# Altium PCB USB_SPI_FLASH.PcbDoc
Units mil, origin at the board's own origin, x right, y up, seen from the top; angles counter-clockwise.
Board outline 1900 x 1950 mil, 2 copper layers (Top Layer, Bottom Layer); 28 components, 20 nets, 122 pads, 16 vias.
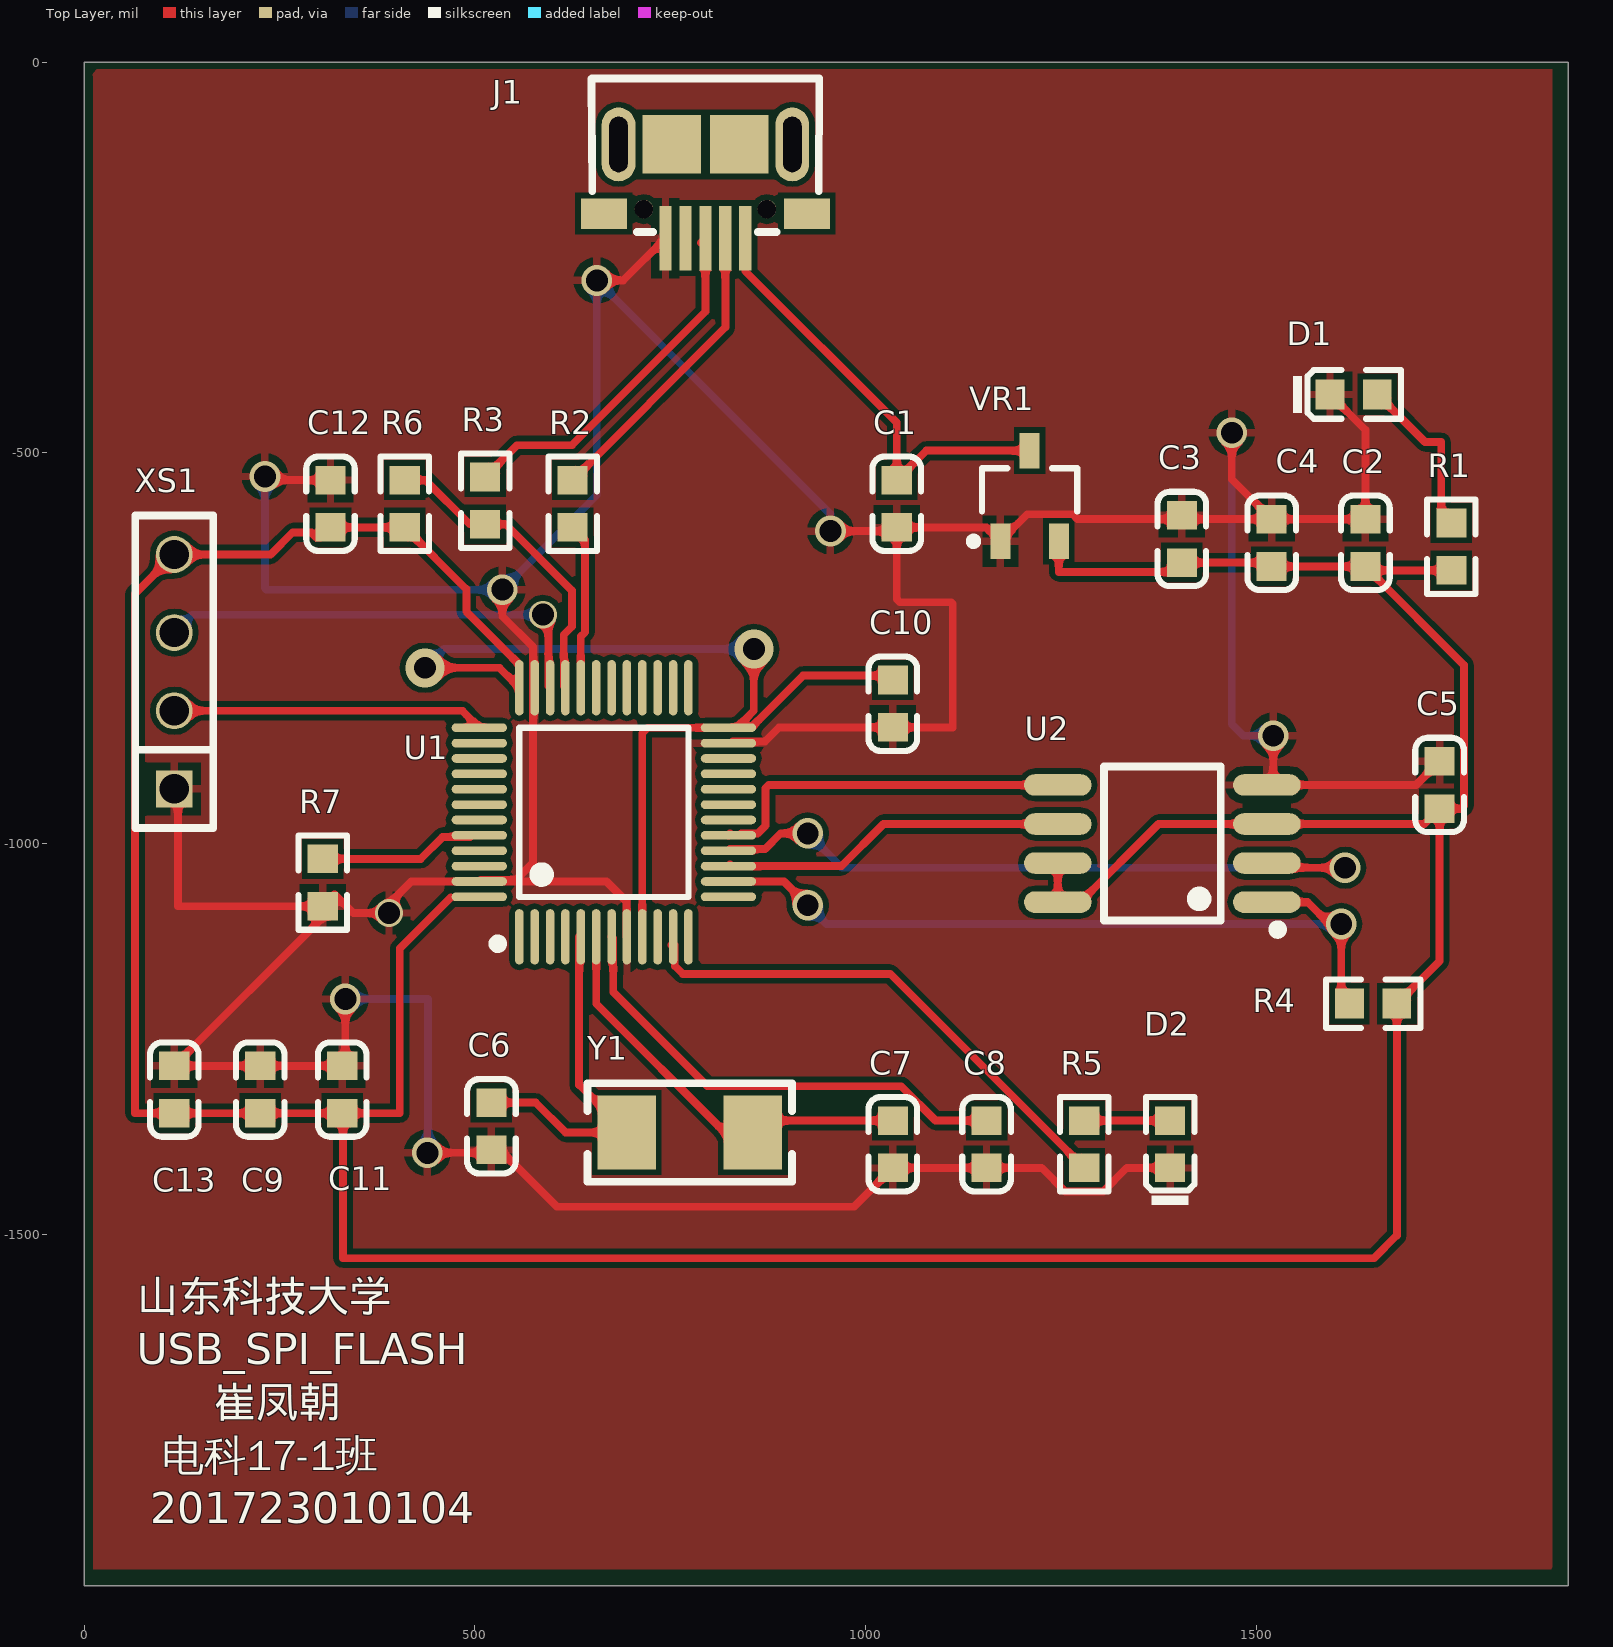
[diagram p0: Top Layer view]
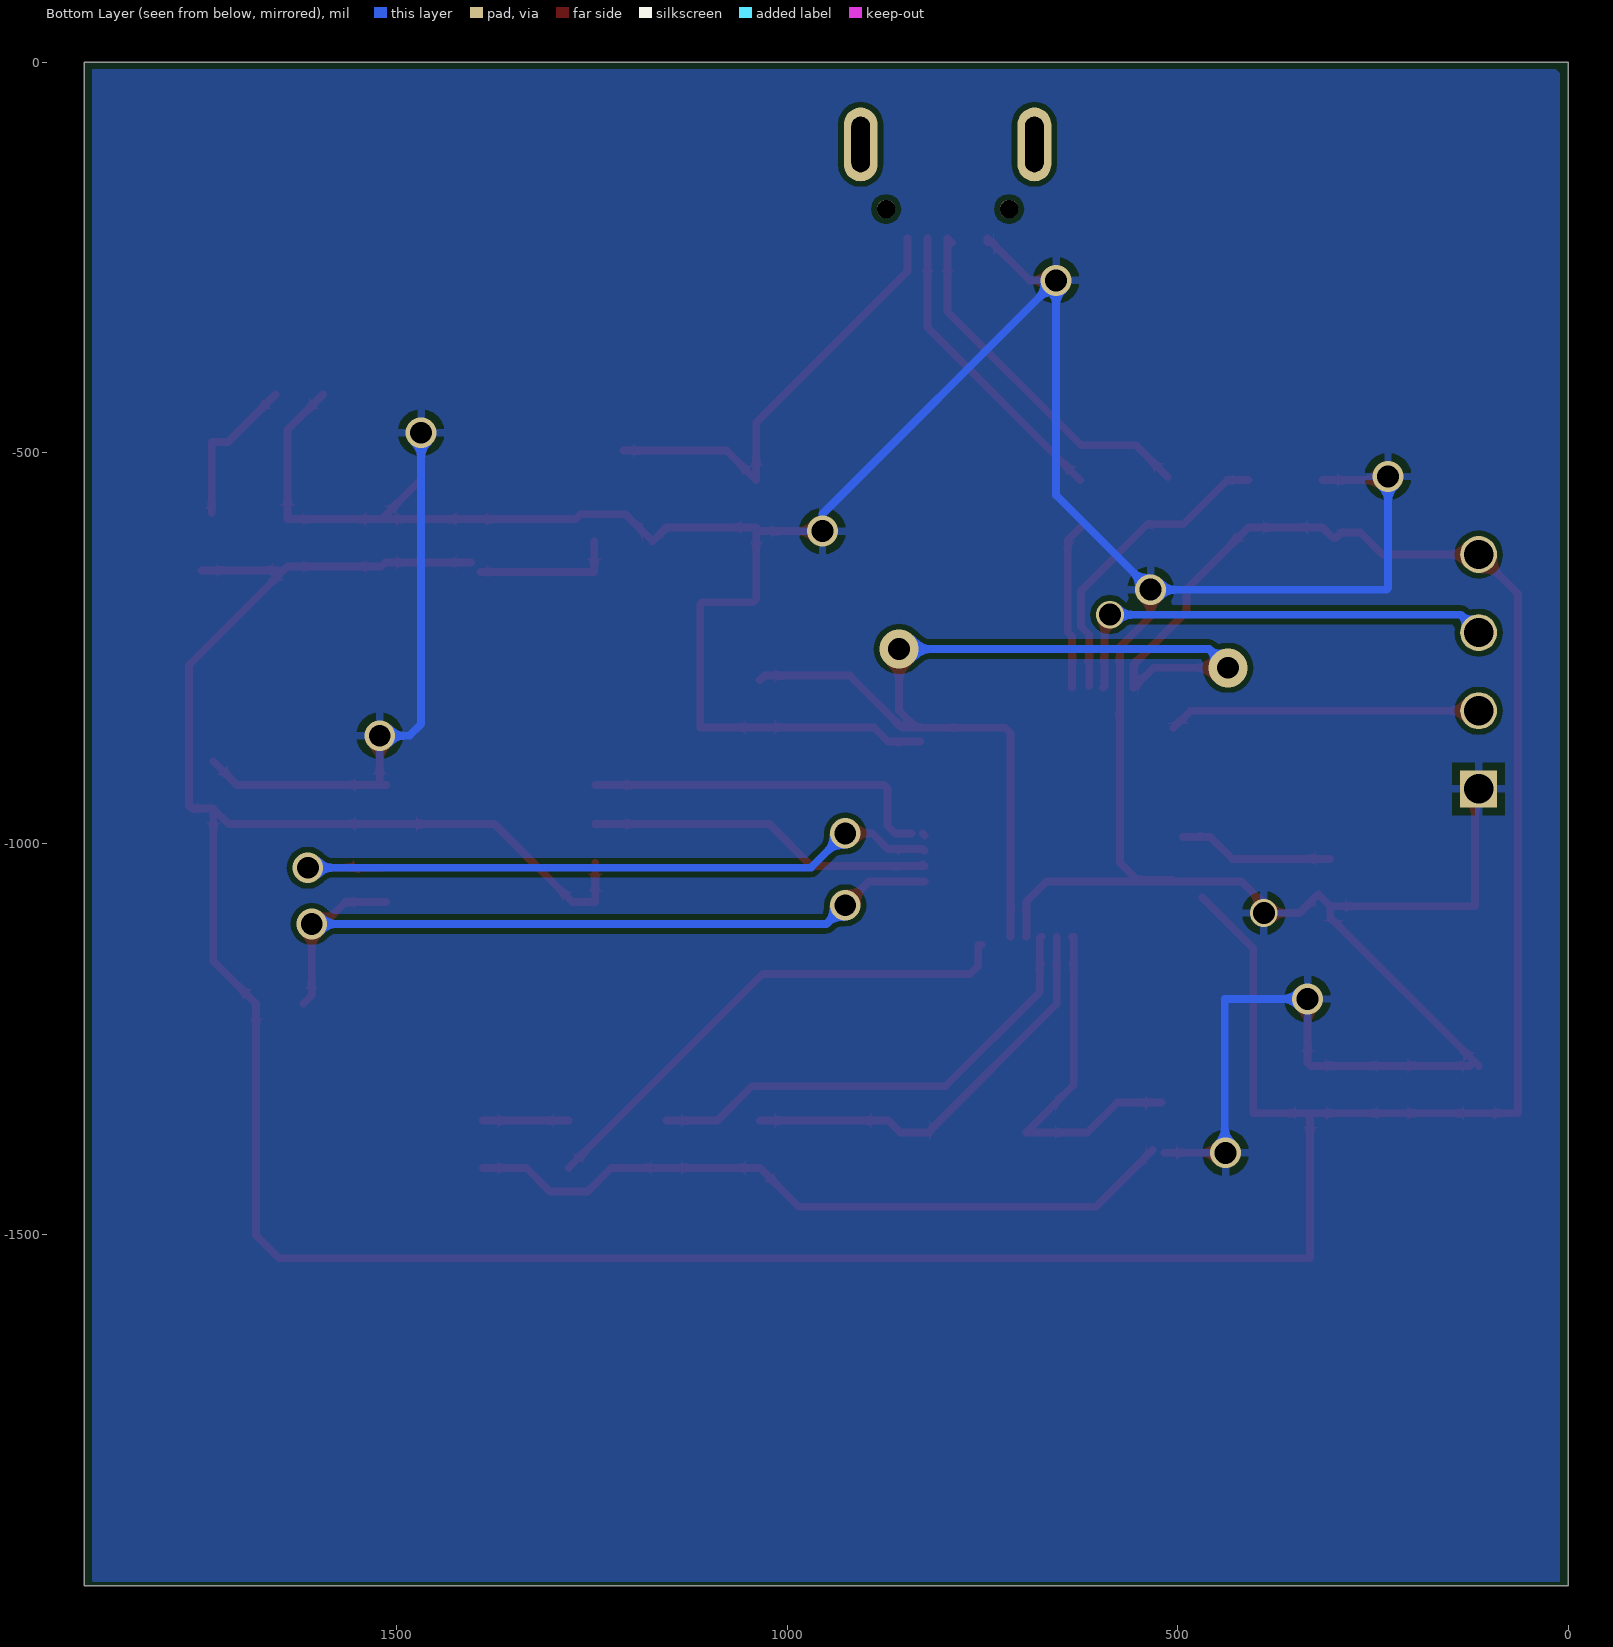
[diagram p1: Bottom Layer view, seen from below]
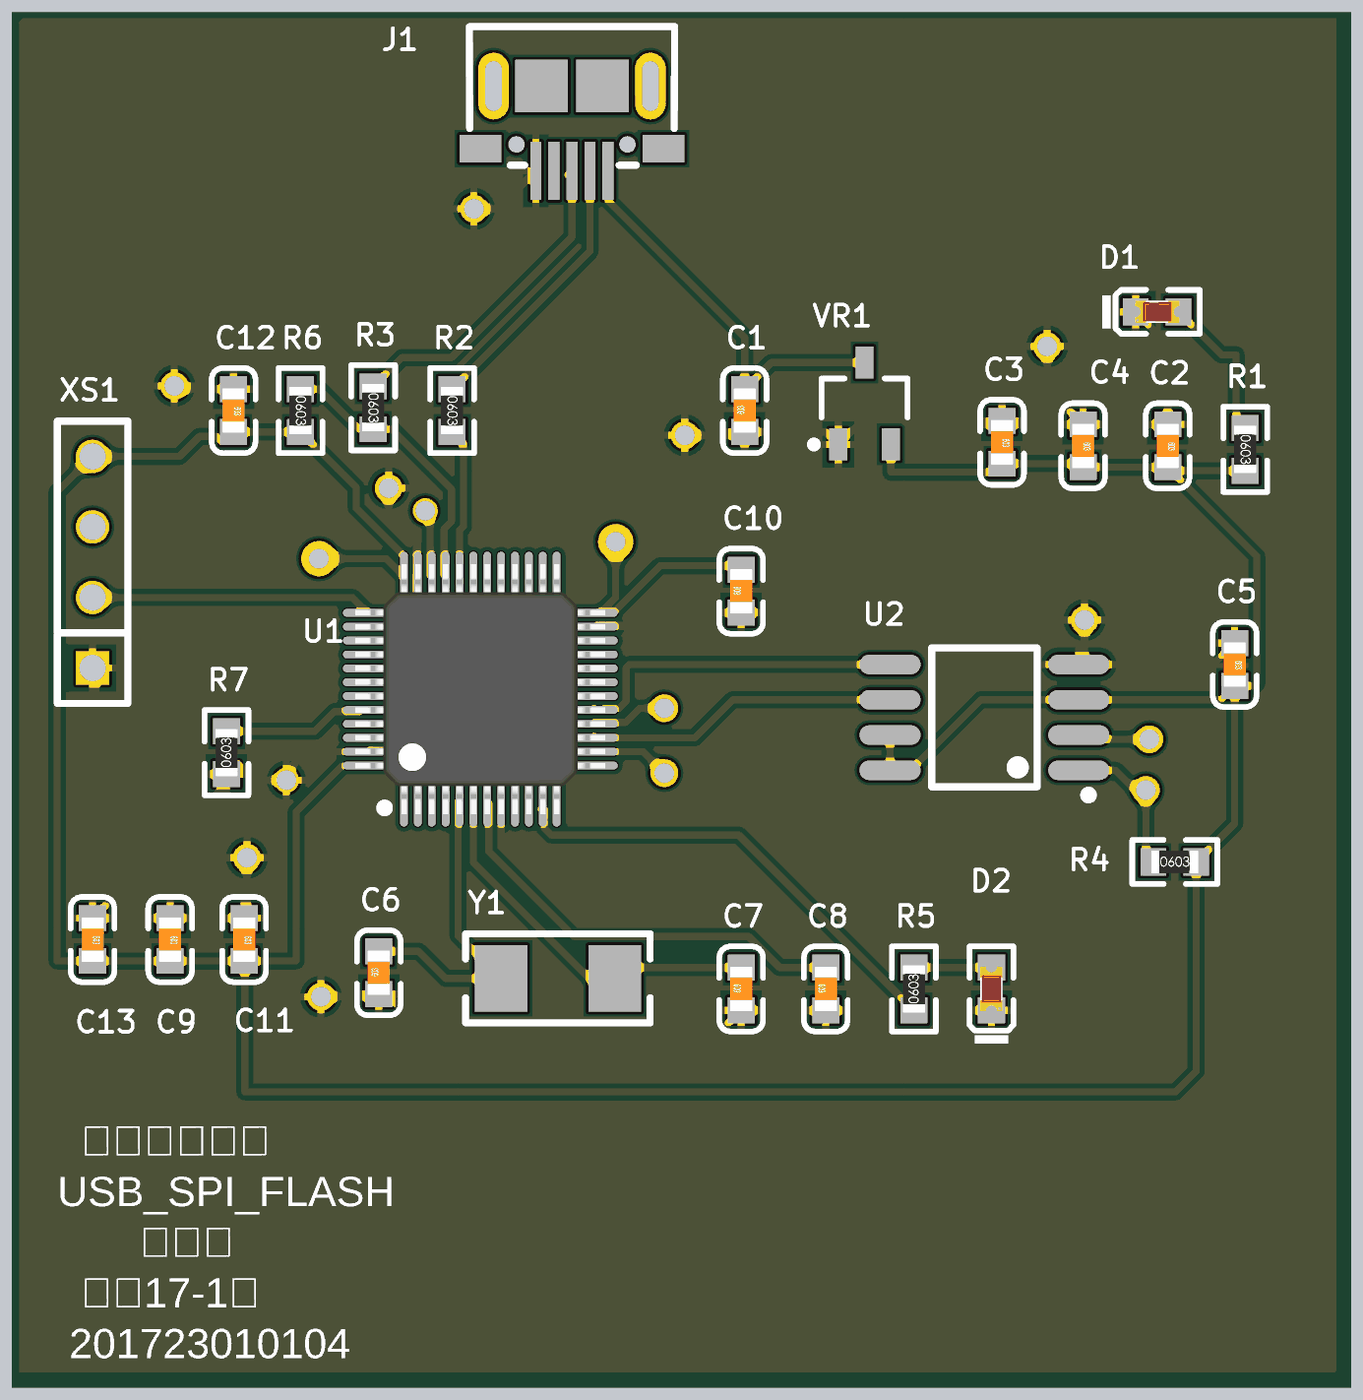
[diagram p2: 3D render of the assembled board from above, using the file's embedded part models]

## Layer stack, top to bottom
Top Solder: solder mask 0.4, Solder Resist, Dk 3.5
Top Layer: signal copper 1.4
Dielectric 1: dielectric 12.6, FR-4, Dk 4.8
Bottom Layer: signal copper 1.4
Bottom Solder: solder mask 0.4, Solder Resist, Dk 3.5

## Board outline
0,-1950 0,0 1900,0 1900,-1950

## Design rules (kind name [scope] priority, off if disabled: settings)
Clearance [All] p1: gap=7
PolygonConnect [All] p1: connectstyle=Relief reliefconductorwidth=10 reliefentries=4 polygonreliefangle="90 Angle" airgapwidth=10
RoutingVias [All] p1: holewidth=28 width=50 viastyle="Through Hole" minholewidth=28 minwidth=35.43 maxholewidth=28 maxwidth=50
SolderMaskExpansion [All] p1: expansion=4
Width [All] p1: maxlimit=15 minlimit=10 preferedwidth=12
30 further rules are at their usual default settings.

## Components (designator, comment, footprint, x,y, rotation, side; value= is the part's Value field where it differs from the comment)
C1 "10uF (106) 10% 10V" 0603_C 1040,-565 r90 top
C2 "100nF (104) 10% 50V" 0603_C 1640,-615 r270 top
C3 "10uF (106) 10% 10V" 0603_C 1405,-610 r270 top
C4 "10uF (106) 10% 10V" 0603_C 1520,-615 r270 top
C5 "100nF (104) 10% 50V" 0603_C 1735,-925 r270 top
C6 "18pF (180) 5% 50V" 0603_C 521,-1362 r90 top
C7 "18pF (180) 5% 50V" 0603_C 1035,-1385 r90 top
C8 "100nF (104) 10% 50V" 0603_C 1155,-1385 r90 top
C9 "100nF (104) 10% 50V" 0603_C 225,-1315 r270 top
C10 "100nF (104) 10% 50V" 0603_C 1035,-821 r90 top
C11 "100nF (104) 10% 50V" 0603_C 330,-1315 r270 top
C12 "100nF (104) 10% 50V" 0603_C 315,-565 r270 top
C13 "4.7uF (475) 10% 16V" 0603_C 115,-1315 r270 top
D1 "红灯 0603" 0603_LED_S1 1625,-425 r0 top
D2 "绿灯 0603" 0603_LED_S1 1390,-1385 r90 top
J1 "USB插头" MICRO-USB-SMD_5P-P0.65-H-F_MICRO5.9MMUSB 795,-165 r180 top
R1 "2KΩ (2001) ±1%" 0603_R 1750,-620 r270 top
R2 "20Ω (20R0) ±1%" 0603_R 625,-565 r270 top
R3 "20Ω (20R0) ±1%" 0603_R 513,-561 r270 top
R4 "10KΩ (1002) ±1%" 0603_R 1650,-1205 r0 top
R5 "2KΩ (2001) ±1%" 0603_R 1280,-1385 r90 top
R6 "1.5KΩ (1501) ±1%" 0603_R 410,-565 r270 top
R7 "10KΩ (1002) ±1%" 0603_R 305,-1050 r90 top
U1 "STM32F103C8T6" LQFP-48_7x7x05P 665,-960 r0 top
U2 "W25Q128JVSIQTR" SOIC-8_208mil 1380,-1000 r90 top
VR1 "XC6206P332MR" SOT-23-3L 1210,-555 r270 top
XS1 "2.54单排单塑排针1*4P" PIN4 115,-930 r90 top
Y1 "8MHz ±20ppm 20pF" SMD-5032_2P 775,-1370 r0 top

## Footprints (in the part's own frame and the unit in brackets; to place one, negate y for a bottom-side part, rotate by r counter-clockwise, add the part's x,y. Pads: shape width x height; smd on the part's side, far side on the other; paste and mask are expansions set on the pad)
0603_C [mm]
  rect 0.93x0.98 smd: 1(-0.77,0) 2(0.77,0)
  silkscreen extent -1.53,-0.79 1.54,0.79, body extent -0.8,-0.4 0.8,0.4, height 0.3
0603_LED_S1 [mm]
  rect 0.93x0.98 smd: A(0.77,0) K(-0.77,0)
  silkscreen extent -1.97,-0.79 1.54,0.79, body extent -0.8,-0.4 0.8,0.4, height 0.6
0603_R [mm]
  rect 0.93x0.98 smd: 1(-0.77,0) 2(0.77,0)
  silkscreen extent -1.53,-0.79 1.54,0.79, body extent -0.85,-0.4 0.85,0.4, height 0.56
LQFP-48_7x7x05P [mm]
  oval 0.28x1.8 smd mask+0.051: 1(-2.75,-4.05) 2(-2.25,-4.05) 3(-1.75,-4.05) 4(-1.25,-4.05) 5(-0.75,-4.05) 6(-0.25,-4.05) 7(0.25,-4.05) 8(0.75,-4.05) 9(1.25,-4.05) 10(1.75,-4.05) 11(2.25,-4.05) 12(2.75,-4.05) 25(2.75,4.05) 26(2.25,4.05) 27(1.75,4.05) 28(1.25,4.05) 29(0.75,4.05) 30(0.25,4.05) 31(-0.25,4.05) 32(-0.75,4.05) 33(-1.25,4.05) 34(-1.75,4.05) 35(-2.25,4.05) 36(-2.75,4.05)
  oval 1.8x0.28 smd mask+0.051: 13(4.05,-2.75) 14(4.05,-2.25) 15(4.05,-1.75) 16(4.05,-1.25) 17(4.05,-0.75) 18(4.05,-0.25) 19(4.05,0.25) 20(4.05,0.75) 21(4.05,1.25) 22(4.05,1.75) 23(4.05,2.25) 24(4.05,2.75) 37(-4.05,2.75) 38(-4.05,2.25) 39(-4.05,1.75) 40(-4.05,1.25) 41(-4.05,0.75) 42(-4.05,0.25) 43(-4.05,-0.25) 44(-4.05,-0.75) 45(-4.05,-1.25) 46(-4.05,-1.75) 47(-4.05,-2.25) 48(-4.05,-2.75)
  silkscreen extent -3.6,-4.42 2.75,2.75, body extent -4.5,-4.5 4.5,4.5, height 1.6
MICRO-USB-SMD_5P-P0.65-H-F_MICRO5.9MMUSB [mm]
  rect 0.4x2.1 smd: 1(-1.3,1.525) 2(-0.65,1.525) 3(0,1.525) 4(0.65,1.525) 5(1.3,1.525)
  rect 1.5x1 smd: 6(-3.3,0.725) 6(3.3,0.725)
  oval 1.1x2.399 hole 0.6 slot 1.8 at 90 deg: 6(-2.825,-1.525) 6(2.825,-1.525)
  rect 1.9x1.9 smd: 6(-1.1,-1.525) 6(1.1,-1.525)
  round 0.6 hole 0.6 unplated: ""(-2,0.575) ""(2,0.575)
  silkscreen extent -3.7,-3.67 3.7,1.32
PIN4 [mm]
  rect 1.2x1.2 hole 0.95: 1(0,0)
  round 1.2 hole 0.95: 2(2.54,0) 3(5.08,0) 4(7.62,0)
  silkscreen extent -1.27,-1.27 8.89,1.27
SMD-5032_2P [mm]
  rect 1.9x2.4 smd: 1(-2.05,0) 2(2.05,0)
  silkscreen extent -3.32,-1.6 3.32,1.6
SOIC-8_208mil [mm]
  oval 0.7x2.2 smd: 1(-1.905,-3.4) 2(-0.635,-3.4) 3(0.635,-3.4) 4(1.905,-3.4) 5(1.905,3.4) 6(0.635,3.4) 7(-0.635,3.4) 8(-1.905,3.4)
  silkscreen extent -2.95,-3.9 2.5,1.9
SOT-23-3L [mm] "http://www.aosmd.com/res/packaging_information/SOT-23-3L.pdf"
  rect 1.15x0.65 smd: 1(1.475,-0.95) 2(1.475,0.95) 3(-1.475,0)
  silkscreen extent -0.9,-1.95 1.6,1.55, body extent -0.9,-1.55 0.9,1.55, height 1.25

## Part data
C1 C3 C4: library part "0603 10uF (106) 10% 10V", "贴片电容"
C2 C5 C8 C9 C10 C11 C12: library part "0603 100nF (104) 10% 50V", "贴片电容"
C6 C7: library part "0603 18pF (180) 5% 50V", "贴片电容"
C13: library part "0603 4.7uF (475) 10% 16V", "贴片电容"
D1: library part "0603 红灯", "发光二极管"
D2: library part "0603 绿灯", "发光二极管"
J1: library part USB-SMD-5.9MM
R1 R5: library part "0603 2KΩ (2001) 1%", "贴片电阻"
R2 R3: library part "0603 20Ω (20R0) 1%", "贴片电阻"
R4 R7: library part "0603 10KΩ (1002) 1%", "贴片电阻"
R6: library part "0603 1.5KΩ (1501) 1%", "贴片电阻"
U1: "ARM"
U2: library part W25Q128JVSIQTR_[C97521], "Flash ROM"
VR1: library part "SOT-23 XC6206P332MR", "低压差线性稳压(LDO)"
Y1: library part "SMD-5032_2P 8MHz 20ppm 20pF", "贴片晶振"

## Via types
v1: diameter 39.37, hole 28, Top Layer to Bottom Layer, 12 vias
v2: diameter 35.43, hole 28, Top Layer to Bottom Layer, 2 vias
v3: diameter 50, hole 28, Top Layer to Bottom Layer, 2 vias

## Nets (pads, with @x,y where several pads share a name; then routed paths per layer and width w, separated by ;. In a path a pad name is that pad's centre, name@x,y a point inside that pad or via, vN(x,y) a via of type N, cw(c..) or ccw(c..) an arc to the next point about the centre after c; other vN are vias at no path point)
3V3: C2.2 C3.2 C4.2 C5.2 C9.2 C10.2 C11.2 C12.2 C13.2 R1.2 R4.2 R6.2 U1.9 U1.24 U1.36 U1.48 U2.3 U2.7 U2.8 VR1.2 XS1.4 | length 6862.4
  Top Layer w10: v3(436,-775) 531.18,-775 U1.36 556.73,-770.73 489,-703 489,-674.32 R6.2 C12.2 301.69,-608.62 297.78,-608.62 290.75,-601.59 266.71,-601.59 238.3,-630 XS1.4 64.68,-680.32 64.68,-1345.32 C13.2 C9.2 C11.2 ; 469,-1069 403.68,-1134.32 403.68,-1345.32 C11.2 ; U1.9 714.21,-858.79 721.27,-851.73 U1.24 U1.24@835.27,-851.73 ; v3(857,-751) 857,-830 U1.24@835.27,-851.73 ; C10.2 1029.31,-785 920,-785 853.27,-851.73 U1.24@835.27,-851.73 ; U2.7 U2.8 1275,-1075 1375,-975 U2.3 1715.32,-975 C5.2 ; VR1.2 1247.4,-652.4 C3.2@1392.91,-652.4 ; C3.2 C4.2@1515,-640.32 ; C4.2 C2.2 C2.2@1645,-650.32 ; R1.2 C2.2@1645,-650.32 ; C11.2 331,-1346.32 331,-1531 1651,-1531 1680.32,-1501.68 R4.2 1735,-1150.32 C5.2 ; C2.2@1645,-650.32 1766.29,-771.61 1766.29,-951.71 1762.69,-955.32 C5.2
  Bottom Layer w10: v3(436,-775) 460,-751 v3(857,-751)
5V: C1.2 J1.1 VR1.3 | length 575.6
  Top Layer w10: J1.1 846.18,-267.18 1040,-461 C1.2 1077.76,-496.93 VR1.3
D+: R3.2 R6.1 U1.33 | length 399.2
  Top Layer w10: R6.1 436.69,-534.69 493.32,-591.32 R3.2 539.32,-591.32 624,-676 624,-722.33 613.61,-732.71 U1.33@613.61,-798.38
D-: R2.2 U1.32 | length 214.2
  Top Layer w10: R2.2 641,-611.32 641,-729.37 635.47,-734.89 U1.32
GND: C1.1 C2.1 C3.1 C4.1 C5.1 C6.1 C7.1 C8.1 C9.1 C10.1 C11.1 C12.1 C13.1 D1.K D2.K J1.5 R7.1 U1.8 U1.23 U1.35 U1.47 U2.4 VR1.1 XS1.1 | length 7043.6
  Top Layer w10: C13.1 305,-1094.68 R7.1 ; XS1.1@119.69,-934.69 119.69,-1080.31 R7.1 ; C13.1@126.68,-1284.68 C9.1 C11.1 ; v1@235.68,-534.68 C12.1 ; C11.1@334,-1280.68 v1(334,-1199) ; v1(439,-1396) C6.1@517.32,-1396 ; C6.1@532.32,-1392.32 605,-1465 985.31,-1465 C7.1 1225.43,-1415.31 1255.74,-1445.62 1304.26,-1445.62 1334.57,-1415.31 D2.K ; v1@535,-688 v1(535,-675) 535,-709 574.24,-748.24 574.24,-1024.68 552.51,-1046.41 507.72,-1046.41 U1.47 ; v1(656,-279) 689.86,-279 J1.5 J1.5@743.82,-229.99 ; U1.8 694.02,-1118.94 694.02,-1074.15 668.45,-1048.58 U1.47 ; U1.23@830,-869.24 871.41,-869.24 889.34,-851.32 C10.1 1111.69,-851.32 1111.69,-693.32 1109.37,-691 1044,-691 1040,-687 C1.1 1154.84,-595.32 VR1.1 1207.24,-578.43 1265.17,-578.43 1271.42,-584.68 C4.1 ; v1(955,-600) C1.1@1035.31,-600 ; v1(1469,-474) 1469,-533.68 C4.1 ; U2.4 1704.69,-925 C5.1 ; U2.4@1522,-923 v1(1522,-862) ; D1.K 1640,-470.31 C2.1 C4.1 ; R7.1 320.31,-1065 344.31,-1089 v2(390,-1089) 390,-1077 418.42,-1048.58 U1.47
  Bottom Layer w10: v1(231,-530) 231,-673 233,-675 v1(535,-675) 656,-554 v1(656,-279) 955,-578 v1(955,-600) ; v1(334,-1199) 440,-1199 v1@440,-1395 ; v1(1469,-474) 1469,-847 1484,-862 v1(1522,-862)
NetC6_2: C6.2 U1.5 Y1.1 | length 467.1
  Top Layer w10: C6.2 577.68,-1331.68 616,-1370 Y1.1 633.3,-1309.01 633.3,-1119.45 U1.5
NetC7_2: C7.2 U1.6 Y1.2 | length 540.2
  Top Layer w10: U1.6 655.16,-1205.16 820,-1370 Y1.2 871.02,-1354.68 C7.2
NetC8_2: C8.2 U1.7 | length 617.7
  Top Layer w10: U1.7 677.02,-1121.62 677.02,-1190.02 797.76,-1310.76 1045.64,-1310.76 1089.57,-1354.68 C8.2
NetD1_A: D1.A R1.1 | length 197.6
  Top Layer w10: D1.A 1716.32,-486 1737,-486 R1.1@1737,-576.69
NetD2_A: D2.A R5.2 | length 110
  Top Layer w10: R5.2 D2.A
NetJ1_2: J1.2 R2.1 | length 390.7
  Top Layer w10: R2.1 820.59,-339.09 J1.2
NetJ1_3: J1.3 R3.1 | length 471.7
  Top Layer w10: R3.1 553.69,-490 624,-490 795,-319 J1.3 J1.3@789.28,-230.76
NetR5_1: R5.1 U1.11 | length 662.4
  Top Layer w10: U1.11@751.41,-1130 755.76,-1130 755.76,-1156.62 766.01,-1166.88 1031.57,-1166.88 R5.1
NetR7_2: R7.2 U1.44 | length 200.2
  Top Layer w10: R7.2 430.61,-1019.68 458.59,-991.7 U1.44@493.65,-991.7
SPI_CS: R4.1 U1.14 U2.1 | length 1020.3
  Top Layer w10: U1.14 895.58,-1048.58 v1(926,-1079) ; U2.1 1566,-1075 1594,-1103 v1(1609,-1103) 1609,-1194.31 R4.1
  Bottom Layer w10: v1(926,-1079) 950,-1103 v1(1609,-1103)
SPI_MISO: U1.16 U2.2 | length 911.1
  Top Layer w10: U1.16 826.62,-1007.04 871.41,-1007.04 891.45,-987 v1(926,-987) ; U2.2@1519.86,-1031 v1(1614,-1031)
  Bottom Layer w10: v1(926,-987) 970,-1031 v1(1614,-1031)
SPI_MOSI: U1.17 U2.5 | length 462.1
  Top Layer w10: U1.17 U1.17@826.62,-987.35 ; U1.17@841,-987.35 861.62,-987.35 871.88,-977.1 871.88,-929.12 876,-925 U2.5
SPI_SCK: U1.15 U2.6 | length 447.1
  Top Layer w10: U1.15@826.62,-1026.72 U1.15 969.1,-1028.9 1023,-975 U2.6
SWCLK: U1.37 XS1.2 | length 399.6
  Top Layer w10: XS1.2 483.82,-830 U1.37
SWDIO: U1.34 XS1.3 | length 585.9
  Top Layer w10: v2(587,-707) 593.93,-713.93 593.93,-798.38 U1.34
  Bottom Layer w10: XS1.3@110,-735 XS1.3 138,-707 v2(587,-707)
pads on no net: J1. J1.4 J1.6 U1.1 U1.2 U1.3 U1.4 U1.10 U1.12 U1.13 U1.18 U1.19 U1.20 U1.21 U1.22 U1.25 U1.26 U1.27 U1.28 U1.29 U1.30 U1.31 U1.38 U1.39 U1.40 U1.41 U1.42 U1.43 U1.45 U1.46

## Polygon pours and split planes (outlines as drawn)
GND on Bottom Layer "Top Layer-No Net" (solid, remove dead copper, pour order 0): 11,-14 16,-9 1890,-9 1890,-1943 1892,-1945 11,-1945 11,-16 6,-11
GND on Top Layer "Top Layer-No Net" (solid, remove dead copper, pour order 2): 11,-14 16,-9 1879,-9 1879,-1926 1890,-1937 1882,-1929 11,-1929 11,-17 8,-14

## Silkscreen, mask and mechanical layers (free items; w line width, h text height)
Top Overlay:
  text "山东科技大学 / USB_SPI_FLASH /        崔凤朝 /   电科17-1班 /  201723010104" at 67,-1884 h67.87
Mechanical 1:
  the board outline again, w10